# EAGLE board CPC5750U_Breakout (EAGLE 7.5.0)
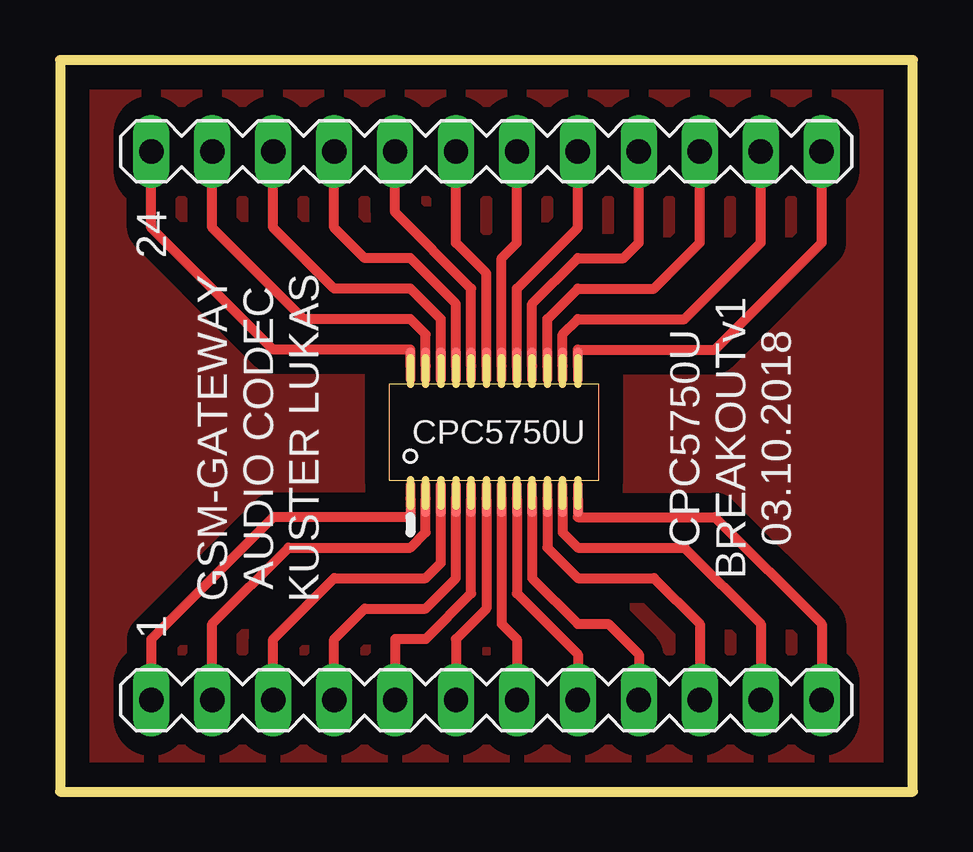
[diagram p0: board, top side]

Size 35.56 x 30.48 mm. Coordinates in mm from the lower left corner, seen from the top.
Outline: 0,0 35.56,0 35.56,30.48 0,30.48 0,0
Copper layers (1*16): Top 0.035mm / dielectric 1.5mm / Bottom 0.035mm
Design rules "default": minimum track width 10mil, minimum drill 24mil, track to track 8mil, track to pad 8mil, pad to pad 8mil, via to via 8mil, smd to smd 8mil, copper to edge 40mil, drill to drill 8mil, minimum pad ring 10mil, minimum via ring 8mil, stop-mask expansion 4mil, vias tented up to drill 0mil, thermal gap 10mil

## Footprints (pad centres in the part's own frame; a part is rotated, then mirrored left to right if it is on the bottom)
MA12-1 = drill 1.016 long: 1 -13.97,0; 2 -11.43,0; 3 -8.89,0; 4 -6.35,0; 5 -3.81,0; 6 -1.27,0; 7 1.27,0; 8 3.81,0; 9 6.35,0; 10 8.89,0; 11 11.43,0; 12 13.97,0
CPC5750 = smd 0.406 x 1.549: A_IN+ 1.905,6.299; A_IN- 1.27,6.299; A_OUT+ 3.175,6.299; A_OUT- 2.54,6.299; CS 3.81,0.775; D0 6.35,0.775; D1 6.985,0.775; D2 6.985,6.299; D3 6.35,6.299; D_RX 0.635,0.775; D_TX 1.27,0.775; FS 2.54,0.775; MUTE 5.715,6.299; PCLK 0,0.775; RST 1.905,0.775; SCLK 5.08,0.775; SDIN 5.715,0.775; SDO 4.445,0.775; SFSEL 3.175,0.775; V_CC 3.81,6.299; V_DD 0,6.299; V_EE 4.445,6.299; V_REF 5.08,6.299; V_SS 0.635,6.299

## Placement (x,y rotation side)
BTM  [MA12-1]  17.78,3.81 0 top
E$1  [CPC5750]  14.61,11.43 0 top
TOP  [MA12-1]  17.78,26.67 0 top

## Library data of the parts
BTM TOP = con-lstb
E$1 = DA-CPC5750U

## Nets
S$2: E$1.V_SS TOP.2
S$3: E$1.A_IN- TOP.3
S$4: E$1.A_IN+ TOP.4
S$5: E$1.A_OUT- TOP.5
S$6: E$1.A_OUT+ TOP.6
S$7: E$1.V_CC TOP.7
S$8: E$1.V_EE TOP.8
S$9: E$1.V_REF TOP.9
S$10: E$1.MUTE TOP.10
S$11: E$1.D3 TOP.11
S$12: E$1.D2 TOP.12
S$13: BTM.1 E$1.PCLK
S$14: BTM.2 E$1.D_RX
S$15: BTM.3 E$1.D_TX
S$16: BTM.4 E$1.RST
S$17: BTM.5 E$1.FS
S$18: BTM.6 E$1.SFSEL
S$19: BTM.7 E$1.CS
S$20: BTM.8 E$1.SDO
S$21: BTM.9 E$1.SCLK
S$22: BTM.10 E$1.SDIN
S$23: BTM.11 E$1.D0
S$24: BTM.12 E$1.D1
S$26: E$1.V_DD TOP.1

## Tracks (layer width: path | path; a pad name or v marks a point on that pad's centre or on a via)
GND
  pour Top (isolate 0.813, rank 2): 0,0 35.56,0 35.56,30.48 0,30.48
S$2
  Top 0.406: E$1.V_SS 15.24,19.05 14.61,19.68 10.16,19.68 6.35,23.5 TOP.2
S$3
  Top 0.406: E$1.A_IN- 15.88,19.68 14.61,20.95 11.43,20.95 8.89,23.5 TOP.3
S$4
  Top 0.406: E$1.A_IN+ 16.51,20.32 14.61,22.23 12.7,22.23 11.43,23.5 TOP.4
S$5
  Top 0.406: E$1.A_OUT- 17.14,20.95 13.97,24.13 TOP.5
S$6
  Top 0.406: TOP.6 16.51,22.86 17.78,21.59 E$1.A_OUT+
S$7
  Top 0.406: 19.05,24.77 TOP.7 19.05,22.86 18.41,22.23 E$1.V_CC
S$8
  Top 0.406: TOP.8 21.59,23.5 19.05,20.95 E$1.V_EE
S$9
  Top 0.406: E$1.V_REF 19.68,20.32 21.59,22.23 23.5,22.23 24.13,22.86 TOP.9
S$10
  Top 0.406: E$1.MUTE 20.32,19.68 21.59,20.95 24.77,20.95 26.67,22.86 TOP.10
S$11
  Top 0.406: E$1.D3 20.95,19.05 21.59,19.68 26.04,19.68 29.21,22.86 TOP.11
S$12
  Top 0.406: E$1.D2 21.59,18.41 27.3,18.41 31.75,22.86 TOP.12
S$13
  Top 0.406: E$1.PCLK 14.61,11.43 8.89,11.43 3.81,6.35 BTM.1
S$14
  Top 0.406: BTM.2 6.35,6.99 9.53,10.16 14.61,10.16 15.24,10.79 E$1.D_RX
S$15
  Top 0.406: BTM.3 8.89,6.35 11.43,8.89 15.24,8.89 15.88,9.53 E$1.D_TX
S$16
  Top 0.406: BTM.4 11.43,6.35 12.7,7.62 15.24,7.62 16.51,8.89 E$1.RST
S$17
  Top 0.406: E$1.FS 17.14,8.26 15.24,6.35 13.97,6.35 BTM.5
S$18
  Top 0.406: E$1.SFSEL 17.78,7.62 16.51,6.35 BTM.6
S$19
  Top 0.406: BTM.7 19.05,6.35 18.41,6.99 E$1.CS
S$20
  Top 0.406: E$1.SDO 19.05,8.26 21.59,5.71 BTM.8
S$21
  Top 0.406: E$1.SCLK 19.68,8.89 21.59,6.99 22.86,6.99 24.13,5.71 BTM.9
S$22
  Top 0.406: E$1.SDIN 20.32,10.16 21.59,8.89 24.77,8.89 26.67,6.99 BTM.10
S$23
  Top 0.406: E$1.D0 20.95,10.79 21.59,10.16 26.04,10.16 29.21,6.99 BTM.11
S$24
  Top 0.406: E$1.D1 21.59,11.43 27.3,11.43 31.75,6.99 BTM.12 31.75,4.45
S$26
  Top 0.406: E$1.V_DD 14.61,18.41 8.89,18.41 3.81,23.5 TOP.1

## Text on the board
tNames: 24 | GSM-GATEWAY / AUDIO CODEC / KUSTER LUKAS | CPC5750U / BREAKOUTv1 / 03.10.2018 | 1
bNames: D3 | D2 | V_DD | V_SS | V_CC | V_EE | A_IN- | A_IN+ | MUTE | A_OUT- | A_OUT+ | V_REF | PCLK | PCLK | D_RX | D_TX | RST | FS | SFSE | CS | SDO | SCLK | SDIN | D0 | D1